# Altium PCB Ada - Base Block - Baseblock_issue 4.0.PcbDoc (part 1 of 2)
Units mil, origin at the board's own origin, x right, y up, seen from the top; angles counter-clockwise.
Board outline 2389.8 x 4110.27 mil, 2 copper layers (Top Layer, Bottom Layer), stack 61.855 mil thick; 112 components, 93 nets, 358 pads, 233 vias.
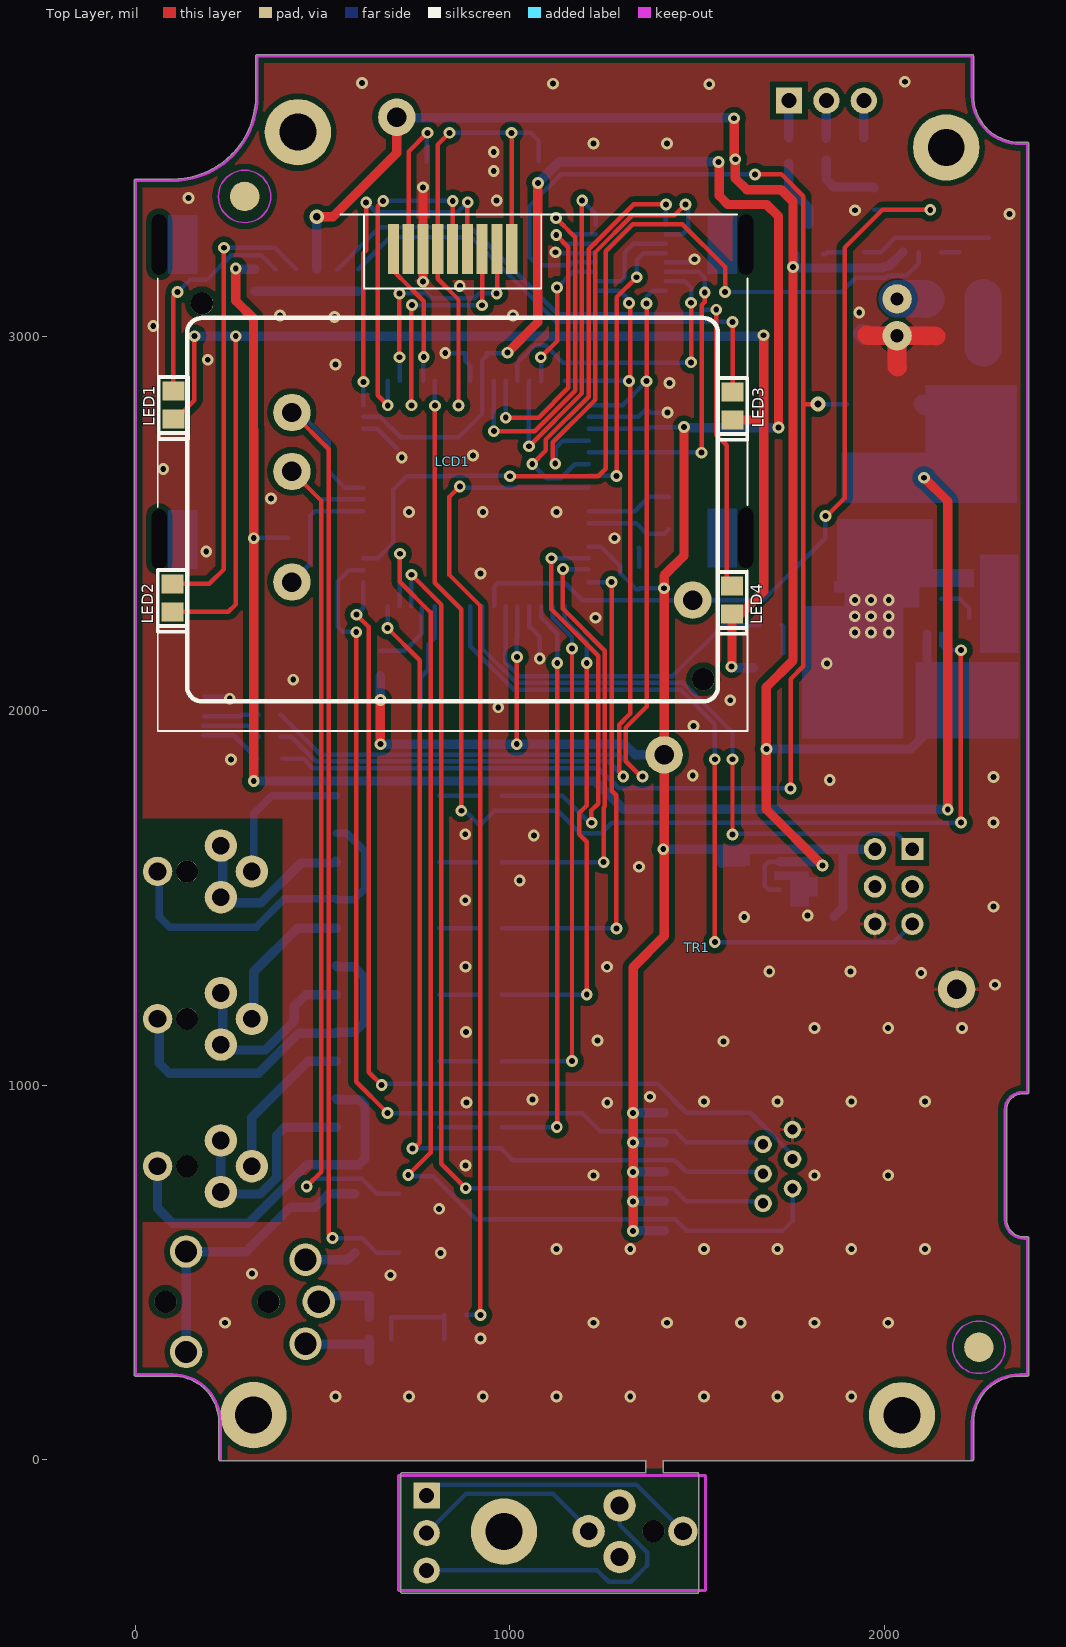
[diagram p0: Top Layer view]
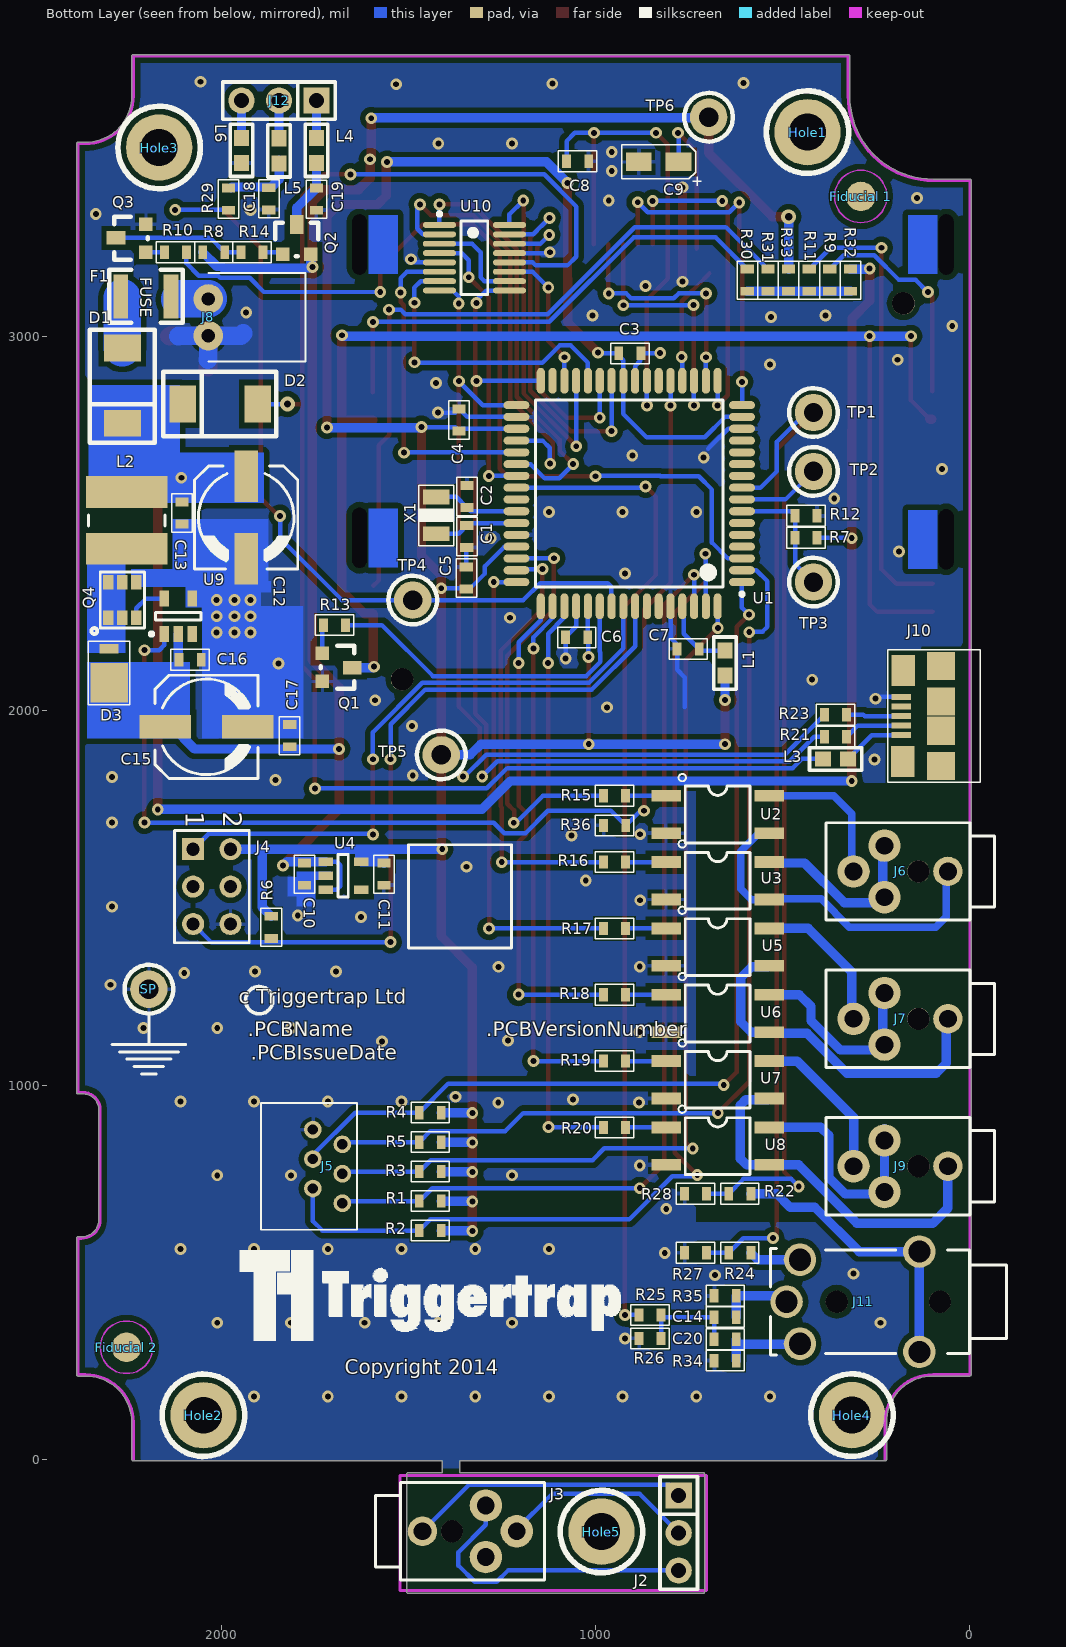
[diagram p1: Bottom Layer view, seen from below]
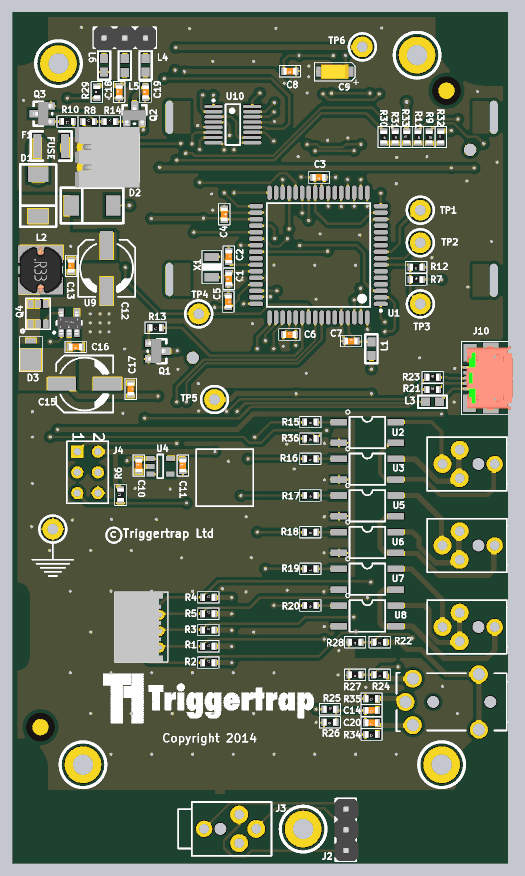
[diagram p3: 3D render of the assembled board from below, using the file's embedded part models]

## Layer stack, top to bottom
Top Solder: solder mask 0.4, Solder Resist, Dk 3.5
Top Layer: signal copper 1.4
Dielectric1: core 59.0551, FR-4, Dk 4.8
Bottom Layer: signal copper 1.4
Bottom Solder: solder mask 0.4, Solder Resist, Dk 3.5

## Board outline
222.63,0.29 cw(c226.58,0.29) 222.63,0.35 222.63,98.71 ccw(c98.63,98.71) 98.63,222.71 cw(c98.63,226.66) 98.6,222.71 0.21,222.71 cw(c0.21,226.66) -3.74,226.66 -3.74,3415.64 cw(c0.21,3415.64) 0.21,3419.59 98.63,3419.59 cw(c98.63,3415.64) 98.66,3419.59 ccw(c98.63,3642.02) 321.06,3641.99 cw(c325.01,3642.02) 321.06,3642.02 321.06,3748.32 cw(c325.01,3748.32) 325.01,3752.27 2234.46,3752.27 cw(c2234.46,3748.32) 2238.41,3748.32 2238.41,3642.02 ccw(c2362.41,3642.02) 2362.41,3518.02 cw(c2362.41,3514.07) 2362.44,3518.02 2382.1,3518.02 cw(c2382.1,3514.07) 2386.05,3514.07 2386.05,980.31 cw(c2382.1,980.31) 2382.1,976.36 2368.9,976.36 ccw(c2368.9,980.31) 2368.93,976.36 2368.9,976.36 ccw(c2368.9,934.25) 2326.79,934.25 2326.79,640.55 ccw(c2372.83,640.55) 2372.83,594.5 2382.1,594.5 cw(c2382.1,590.55) 2386.05,590.55 2386.05,226.66 cw(c2382.1,226.66) 2382.1,222.71 2362.41,222.71 ccw(c2362.41,226.66) 2362.44,222.71 2362.41,222.71 ccw(c2362.41,98.71) 2238.41,98.71 2238.41,0.29 cw(c2234.46,0.29) 2234.46,-3.67 1409.46,-3.67 1409.46,-35.13 1500,-35.13 cw(c1500,-39.08) 1503.95,-39.08 1503.95,-354.05 cw(c1500,-354.05) 1500,-358 712.6,-358 cw(c712.6,-354.05) 708.65,-354.05 708.65,-39.08 cw(c712.6,-39.08) 712.6,-35.13 1362.19,-35.13 1362.19,-3.67 226.65,-3.67 cw(c226.58,0.28)

## Design rules (kind name [scope] priority, off if disabled: settings)
AssemblyTestPointUsage [All] p1 off:
AssemblyTestpoint [All] p1 off: testpointundercomponent=TRUE minsize=40 maxsize=100 preferedsize=60 minholesize=0 maxholesize=40 preferedholesize=32 testpointgrid=1 usegrid=TRUE gridtolerance=0.01 allowsidetop=TRUE allowsidebottom=TRUE
Clearance Clearance_Plane [InPolygon] p1: gap=15 // Clearance to planes
Clearance [All] p2: gap=6
ComponentClearance [All] p1 off: gap=10 collisioncheckmode=3 verticalgap=10 showdistances=FALSE
DiffPairsRouting [All] p1 off: maxlimit=10 minlimit=10 mostfreqgap=10 toplayer_minwidth=15 toplayer_maxwidth=15 toplayer_prefwidth=15 bottomlayer_minwidth=15 bottomlayer_maxwidth=15 bottomlayer_prefwidth=15 maxuncoupledlength=500
FabricationTestPointUsage [All] p1 off: valid=0 allowmultiple=FALSE
FabricationTestpoint [All] p1 off: side=3 testpointundercomponent=TRUE minsize=40 maxsize=100 preferedsize=60 minholesize=0 maxholesize=40 preferedholesize=32 testpointgrid=1 allowsidetop=TRUE allowsidebottom=TRUE usegrid=TRUE gridtolerance=0.01
FanoutControl Fanout_BGA [IsBGA] p1 off: bgadir=Out bgaviamode=Centered fanoutstyle=Auto fanoutdirection=Alternating viagrid=1 // Fanout_BGA (Default Rule)
FanoutControl Fanout_LCC [IsLCC] p2 off: bgadir=Out bgaviamode=Centered fanoutstyle=Auto fanoutdirection=Alternating viagrid=1 // Fanout_LCC (Default Rule)
FanoutControl Fanout_SOIC [IsSOIC] p3 off: bgadir=Out bgaviamode=Centered fanoutstyle=Auto fanoutdirection=Alternating viagrid=1 // Fanout_SOIC (Default Rule)
FanoutControl Fanout_Small [(CompPinCount < 5)] p4 off: bgadir=Out bgaviamode=Centered fanoutstyle=Auto fanoutdirection=OutThenIn viagrid=1 // Fanout_Small (Default Rule)
FanoutControl Fanout_Default [All] p5 off: bgadir=Out bgaviamode=Centered fanoutstyle=Auto fanoutdirection=Alternating viagrid=1 // Fanout_Default (Default Rule)
Height Height_1 [WithinRoom('RoomDefinition_1') and OnBottomLayer] p1: minheight=0 maxheight=104.33 prefheight=62.99
Height [WithinRoom('RoomDefinition') and OnBottomLayer] p2: minheight=0 maxheight=708.66 prefheight=708.66
HoleSize [All] p1 off: absolutevalues=TRUE maxlimit=250 minlimit=1 maxpercent=80.000 minpercent=20.000
HoleSize Testpoint [All] p2 off: absolutevalues=TRUE maxlimit=100 minlimit=1 maxpercent=80.000 minpercent=20.000
HoleSize TestPointUsage [All] p3 off: absolutevalues=TRUE maxlimit=100 minlimit=1 maxpercent=80.000 minpercent=20.000
HoleToHoleClearance [All] p1 off: gap=10 allowstackedmicrovias=TRUE
MinimumSolderMaskSliver [All] p1 off: minsoldermaskwidth=3
MinimumSolderMaskSliver SilkscreenOverComponentPads [All] p2 off: minsoldermaskwidth=10
PasteMaskExpansion [All] p1 off: expansion=0
PolygonConnect PolygonConnect_Via [IsVia] p1: connectstyle=Direct reliefconductorwidth=10 reliefentries=4 polygonreliefangle="90 Angle" airgapwidth=10 // Direct connect to vias
PolygonConnect [All] p2: connectstyle=Relief reliefconductorwidth=10 reliefentries=4 polygonreliefangle="90 Angle" airgapwidth=10
RoomDefinition [(InComponentClass('Components Class 1'))] p1: confinementstyle=ConfineIn formatcopy=TRUE lockcomponents=FALSE outline 2462.58,3710.84 1793.29,3710.84 1793.29,-182.86 2462.58,-182.86
RoomDefinition RoomDefinition_1 [(InComponentClass('Components Class 2'))] p2: confinementstyle=ConfineIn formatcopy=TRUE lockcomponents=FALSE outline 1793.29,3734.46 935.02,3734.46 919.27,2974.73 344.47,2971.28 344.47,381.3 1793.29,381.3
RoutingVias [All] p1: holewidth=19.68 width=39.37 viastyle="Through Hole" minholewidth=11.81 minwidth=19.68 maxholewidth=19.68 maxwidth=39.37
SilkToBoardRegionClearance [All] p1 off:
SilkToSilkClearance [All] p1 off: silktosilkclearance=1
SilkToSolderMaskClearance [IsPad] p1: minsilkscreentomaskgap=1 clearancetoexposedcopper=TRUE
SolderMaskExpansion [All] p1: expansion=4
UnpouredPolygon [All] p1: allowunpoured=FALSE
Width [All] p1: maxlimit=500 minlimit=8 preferedwidth=12
10 further rules are at their usual default settings.

## Classes and differential pairs
component class "U_TRI002 Base Block Daughter Board": J2 J3
component class "TRI002 Base Block Cover sheet Issue 3.1": "Fiducial 1" "Fiducial 2" Hole1 Hole2 Hole3 Hole4 Hole5 SP TR1
component class "U_TRI002 Base Block Microcontroller Issue 1": C1 C2 C3 C4 C5 C6 C7 C8 C9 J4 J5 L1 LCD1 LED1 LED2 LED3 LED4 Q1 Q2 Q3 R1 R2 R3 R4 R5 R6 R7 R8 R9 R10 R11 R12 R13 R14 R30 R31 R32 R33 TP1 TP2 TP3 TP4 U1 X1
component class "U_TRI002 Base Block PSU and Connectors Issue 1": C10 C11 C12 C13 C14 C15 C16 C17 C18 C19 C20 D1 D2 D3 F1 J6 J7 J8 J9 J10 J11 J12 L2 L3 L4 L5 L6 Q4 R15 R16 R17 R18 R19 R20 R21 R22 R23 R24 R25 R26 R27 R28 R29 R34 R35 R36 TP5 TP6 U2 U3 U4 U5 U6 U7 U8 U9 U10

## Components (designator, comment, footprint, x,y, rotation, side; value= is the part's Value field where it differs from the comment)
C1 "18pF" C0603 1345.53,2465.01 r90 bottom
C2 "18pF" C0603 1341.15,2571.69 r270 bottom
C3 "100nF, 16V, 0603" C0603 908.24,2952.31 r0 bottom
C4 "100nF, 16V, 0603" C0603 1362.65,2776.52 r270 bottom
C5 "10nF" C0603 1342.96,2354.33 r270 bottom
C6 "10nF" C0603 1050.15,2197.6 r180 bottom
C7 "1uF, 16V, 0603" C0603 752.41,2166.28 r180 bottom
C8 "100nF, 16V, 0603" C0603 1047.69,3465.5 r0 bottom
C9 "4U7F, 10V, case_a" "KEMET CASE A" 831.15,3465.5 r0 bottom
C10 "1uF, 16V, 0603" C0603 1779.53,1562.99 r90 bottom
C11 "1uF, 16V, 0603" C0603 1566.93,1562.99 r90 bottom
C12 "10uF,16V,SMD" CAP6.8/6.8 1933.07,2515.75 r270 bottom
C13 "2u2F" C0603 2106.3,2527.56 r90 bottom
C14 "100nF, 16V, 0603" C0603 653.54,377.95 r0 bottom
C15 "220uF, 16V, SMD" CAP6.8/6.8 2039.37,1956.69 r180 bottom
C16 "100nF, 16V, 0603" C0603 2082.68,2133.86 r0 bottom
C17 "2u2F" C0603 1814.96,1933.07 r270 bottom
C18 "Capacitor 0603" C0603 1874.46,3367.07 r90 bottom
C19 "Capacitor 0603" C0603 1747.13,3366.01 r90 bottom
C20 "100nF, 16V, 0603" C0603 653.54,318.9 r0 bottom
D1 "BYM13-40" DO214-AA 2263.78,2767.72 r90 bottom
D2 "BYM13-40" DO214-AA 2102.36,2818.9 r180 bottom
D3 "MBRM110LT3G" POWERMITE 2299.21,2074.8 r90 bottom
F1 "500mA polyfuse" "1210 FUSE" 2200.79,3106.3 r0 bottom
"Fiducial 1" "Fiducial" FMARK 291.44,3373.27 r90 bottom
"Fiducial 2" "Fiducial" FMARK 2252.73,299.43 r90 bottom
Hole1 "3mm Mounting hole" "3mm mounting hole" 433.65,3545.09 r180 bottom
Hole2 "3mm Mounting hole" "3mm mounting hole" 2047.15,117.91 r180 bottom
Hole3 "3mm Mounting hole" "3mm mounting hole" 2165.44,3504.05 r180 bottom
Hole4 "3mm Mounting hole" "3mm mounting hole" 315.06,118.24 r180 bottom
Hole5 "3mm Mounting hole" "3mm mounting hole" 984.02,-192.91 r180 bottom
J2 "Header 3" sip3 777.77,-96.57 r270 bottom
J3 "2.5mm PHONEJACK STEREO TRI001" "2.5MM SOCKET TRI001" 1462.18,-191.98 r270 bottom
J4 "JTAG" HDR2X3 2074.8,1629.92 r270 bottom
J5 "Keypad connector" HLW6R-2C7LF 1676.09,762.83 r270 bottom locked
J6 "2.5mm PHONEJACK STEREO TRI001" "2.5MM SOCKET TRI001" 58.71,1570.41 r90 bottom
J7 "2.5mm PHONEJACK STEREO TRI001" "2.5MM SOCKET TRI001" 58.71,1176.71 r90 bottom
J8 "Battery 3V" "Molex 0022057025" 2034.06,3001.24 r270 bottom locked
J9 "2.5mm PHONEJACK STEREO TRI001" "2.5MM SOCKET TRI001" 58.71,783.01 r90 bottom
J10 "micro USB Female" "MICRO USB RECEPTACLE" 183.39,1934.39 r90 bottom
J11 "3.5mm PHONEJACK STEREO TRI001" "CLIFF 3.5MM 4 POLE SOCKET" 1.23,421.12 r90 bottom
J12 "Header 3" sip3 1745.32,3629.28 r0 bottom locked
L1 "0R15,1A,220R,0603" L0603 653.99,2126.91 r90 bottom
L2 "Inductance" WE-PD2_5848 2251.97,2507.87 r270 bottom
L3 "0R15,1A,220R,0603" L0603 358.71,1871.01 r0 bottom
L4 "0R15,1A,220R,0603" L0603 1745.15,3496.31 r270 bottom
L5 "0R15,1A,220R,0603" L0603 1845.33,3495.13 r270 bottom
L6 "0R15,1A,220R,0603" L0603 1945.53,3496.31 r270 bottom
LCD1 "LPH-7366" LPH-7366 846.68,2575.73 r0 top
LED1 "LED RED 0805 SUPER-RED" "LED, RED, 0805" 101.07,2816.01 r270 top
LED2 "LED RED 0805 SUPER-RED" "LED, RED, 0805" 98.79,2301.06 r270 top
LED3 "LED RED 0805 SUPER-RED" "LED, RED, 0805" 1594.6,2813.5 r270 top
LED4 "LED RED 0805 SUPER-RED" "LED, RED, 0805" 1593.27,2295.73 r270 top
Q1 "FDN335N" SOT-23 1729.47,2153.06 r270 bottom
Q2 "NTR2101PT1G" "SOT-23 DIODE - duplicate" 1835.87,3218.67 r180 bottom
Q3 "BC847B" SOT-23T 2200.79,3224.41 r90 bottom
Q4 "" TSOP6 2263.78,2295.28 r90 bottom
R1 "Resistor 0603" R0603 1441.39,689.92 r180 bottom
R2 "Resistor 0603" R0603 1441.39,611.18 r180 bottom
R3 "Resistor 0603" R0603 1441.39,768.66 r180 bottom
R4 "Resistor 0603" R0603 1441.39,926.14 r180 bottom
R5 "Resistor 0603" R0603 1441.39,847.4 r180 bottom
R6 "Resistor 0603" R0603 1866.14,1421.26 r90 bottom
R7 "Resistor 0603" R0603 437.45,2461.56 r180 bottom
R8 "Resistor 0603" R0603 2019.68,3224.41 r180 bottom
R9 "Resistor 0603" R0603 374.02,3149.61 r270 bottom
R10 "Resistor 0603" R0603 2122.05,3224.41 r0 bottom
R11 "Resistor 0603" R0603 429.13,3149.61 r270 bottom
R12 "Resistor 0603" R0603 437.45,2520.61 r0 bottom
R13 "Resistor 0603" R0603 1696.85,2228.35 r0 bottom
R14 "Resistor 0603" R0603 1917.32,3224.41 r180 bottom
R15 "Resistor 0603" R0603 949.26,1772.58 r0 bottom
R16 "Resistor 0603" R0603 949.26,1595.42 r0 bottom
R17 "Resistor 0603" R0603 949.26,1418.25 r0 bottom
R18 "Resistor 0603" R0603 949.26,1241.09 r0 bottom
R19 "Resistor 0603" R0603 949.26,1063.92 r0 bottom
R20 "Resistor 0603" R0603 949.26,886.76 r0 bottom
R21 "Resistor 0603" R0603 358.71,1930.06 r180 bottom
R22 "Resistor 0603" R0603 614.62,709.59 r0 bottom
R23 "Resistor 0603" R0603 358.71,1989.12 r180 bottom
R24 "Resistor 0603" R0603 614.62,552.11 r0 bottom
R25 "Resistor 0603" R0603 854.33,385.83 r180 bottom
R26 "Resistor 0603" R0603 854.33,322.83 r0 bottom
R27 "Resistor 0603" R0603 732.73,552.11 r0 bottom
R28 "Resistor 0603" R0603 732.73,709.59 r0 bottom
R29 "Resistor 0603" R0603 1980.32,3366.14 r90 bottom
R30 "Resistor 0603" R0603 594.49,3149.61 r270 bottom
R31 "Resistor 0603" R0603 539.37,3149.61 r270 bottom
R32 "Resistor 0603" R0603 318.9,3149.61 r90 bottom
R33 "0R" R0603 484.25,3149.61 r90 bottom
R34 "0R" R0603 653.54,263.78 r0 bottom
R35 "0R" R0603 653.54,437.01 r0 bottom
R36 "Resistor 0603" R0603 948.82,1692.91 r0 bottom
SP "Scope GND point" "Scope GND point" 2192.91,1255.91 r180 bottom
TP1 "Test point" TP 417.76,2796.21 r180 bottom
TP2 "Test point" TP 417.76,2638.73 r180 bottom
TP3 "Test point" TP 417.76,2343.45 r180 bottom
TP4 "Test point" TP 1488.19,2295.28 r180 bottom
TP5 "Test point" TP 1411.86,1881.89 r180 bottom
TP6 "Test point" TP 697.88,3584.92 r180 bottom
TR1 "trace label" TraceLabel 1500,1366.14 r180 top
U1 "ATxmega256A3U-AU" 64A_N 909.89,2579.67 r0 bottom
U2 "LTV-817" SMD-4 811.47,1772.58 r180 bottom
U3 "LTV-817" SMD-4 811.47,1595.42 r180 bottom
U4 "AAT3221IGV-3.3-T1" "TSOT 5 pin" 1673.23,1559.06 r180 bottom
U5 "LTV-817" SMD-4 811.47,1418.25 r180 bottom
U6 "LTV-817" SMD-4 811.47,1241.09 r180 bottom
U7 "LTV-817" SMD-4 811.47,1063.92 r180 bottom
U8 "LTV-817" SMD-4 811.47,886.76 r180 bottom
U9 "NCP1450" SOT23-5AN 2114.17,2251.97 r90 bottom
U10 "FT230XS-R" SSOP-16_N 1323.28,3209.59 r180 bottom
X1 "XTAL 32.768KHZ" "FC 13F" 1425.2,2472.44 r90 bottom

## Footprints (in the part's own frame and the unit in brackets; to place one, negate y for a bottom-side part, rotate by r counter-clockwise, add the part's x,y. Pads: shape width x height; smd on the part's side, far side on the other; paste and mask are expansions set on the pad)
"2.5MM SOCKET TRI001" [mm]
  round 1.5 hole 1.5 unplated: 0(0,2)
  round 2 hole 1.2: 1(0,0)
  round 2.2 hole 1.2: 2(-1.75,4.3) 3(1.75,4.3) 4(0,6.4)
  silkscreen extent -3.3,-3.18 3.3,8.27, body extent -2.5,-4.2 2.5,6.6, height 5
"3mm mounting hole" [mm]
  round 4.5 hole 2.5: 1(0,0)
  silkscreen extent -2.8,-2.8 2.8,2.8
64A_N [mm] "Thin QFP, 64-Leads, Body 14x14mm, Pitch 0.8mm, IPC Medium Density"
  oval 1.75x0.55 smd: 1(-7.65,6) 2(-7.65,5.2) 3(-7.65,4.4) 4(-7.65,3.6) 5(-7.65,2.8) 6(-7.65,2) 7(-7.65,1.2) 8(-7.65,0.4) 9(-7.65,-0.4) 10(-7.65,-1.2) 11(-7.65,-2) 12(-7.65,-2.8) 13(-7.65,-3.6) 14(-7.65,-4.4) 15(-7.65,-5.2) 16(-7.65,-6) 33(7.65,-6) 34(7.65,-5.2) 35(7.65,-4.4) 36(7.65,-3.6) 37(7.65,-2.8) 38(7.65,-2) 39(7.65,-1.2) 40(7.65,-0.4) 41(7.65,0.4) 42(7.65,1.2) 43(7.65,2) 44(7.65,2.8) 45(7.65,3.6) 46(7.65,4.4) 47(7.65,5.2) 48(7.65,6)
  oval 0.55x1.75 smd: 17(-6,-7.65) 18(-5.2,-7.65) 19(-4.4,-7.65) 20(-3.6,-7.65) 21(-2.8,-7.65) 22(-2,-7.65) 23(-1.2,-7.65) 24(-0.4,-7.65) 25(0.4,-7.65) 26(1.2,-7.65) 27(2,-7.65) 28(2.8,-7.65) 29(3.6,-7.65) 30(4.4,-7.65) 31(5.2,-7.65) 32(6,-7.65) 49(6,7.65) 50(5.2,7.65) 51(4.4,7.65) 52(3.6,7.65) 53(2.8,7.65) 54(2,7.65) 55(1.2,7.65) 56(0.4,7.65) 57(-0.4,7.65) 58(-1.2,7.65) 59(-2,7.65) 60(-2.8,7.65) 61(-3.6,7.65) 62(-4.4,7.65) 63(-5.2,7.65) 64(-6,7.65)
  silkscreen extent -7.77,-6.35 6.35,6.95, body extent -7,-7 7,7, height 1.2
"1210 FUSE" [mm]
  rect 1x3 smd: 1(-1.7,0) 2(1.7,0)
  silkscreen extent -2.5,-1.8 2.5,1.8
C0603 [mm] "Chip Capacitor; Body 1.6 x 0.8 mm (LxW typ)"
  rect 0.6x0.9 smd: 1(-0.75,-0.05) 2(0.75,-0.05)
  silkscreen extent -1.3,-0.75 1.3,0.65, body extent -0.8,-0.45 0.8,0.35, height 0.3
CAP6.8/6.8 [mm]
  rect 3.5x1.6 smd: 1(-2.8,0) 2(2.8,0)
  silkscreen extent -3.5,-3.5 3.5,3.5, body extent -3.3,-3.3 3.3,3.3, height 5.4
"CLIFF 3.5MM 4 POLE SOCKET" [mm]
  round 1.5 hole 1.5 unplated: 0(0,2) 0(0,9)
  round 2.2 hole 1.5: 1(0,12.4) 2(2.85,11.5) 3(-3.4,3.4) 3(3.4,3.4) 6(-2.85,11.5)
  silkscreen extent -3.6,-2.5 3.6,13.5, body extent -3.5,-2.5 3.5,12.6, height 6
DO214-AA [mm]
  rect 1.8x2.5 smd: A(5.1,0) K(0,0)
  silkscreen extent -1.32,-2.2 6.35,2.2, body extent -0.25,-2.13 5.65,2.18, height 3.74
"FC 13F" [mm]
  rect 1x1.8 smd: 1(0,0) 2(2.5,0)
  silkscreen extent -0.8,-1.2 3.3,1.2
FMARK [mm]
  round 2 all layers, no hole mask+0.762: 0(0,0)
  Keep-Out Layer circle w0.1: c0,0 r1.778
HDR2X3 [mm] "Connector; Header; 2x3 Position"
  rect 1.5x1.5 hole 0.9: 1(0,0)
  round 1.5 hole 0.9: 2(0,2.54) 3(2.54,0) 4(2.54,2.54) 5(5.08,0) 6(5.08,2.54)
  silkscreen extent -1.27,-1.27 6.35,3.81
HLW6R-2C7LF [mm] "FFC 6 way 1mm pitch"
  round 1.2 hole 0.7: 1(-3,-2) 2(-2,0) 3(-1,-2) 4(0,0) 5(1,-2) 6(2,0)
  silkscreen extent -4.8,-5.53 3.8,1, body extent -4.8,-5.5 3.8,0.4, height 3.91
"KEMET CASE A" [mm]
  rect 1.75x1.25 smd: 1(-1.35,0) 2(1.35,0)
  silkscreen extent -2.9,-1.15 2.5,1.6, body extent -2.39,-0.9 2.41,0.9, height 1.8
L0603 [mm] "INDUCTOR"
  rect 1.1x1 smd: 1(-0.85,0) 2(0.85,0)
  silkscreen extent -1.78,-0.76 1.78,0.76, body extent -1.5,-0.6 1.5,0.6, height 1
"LED, RED, 0805" [mm] "LED RED"
  rect 1.3x1.5 smd: A(-0.95,0) K(0.95,0)
  silkscreen extent -1.9,-1 2.3,1, body extent -1.7,-0.85 1.7,0.85, height 1
LPH-7366 [mm]
  rrect100% 0x0 hole 1 slot 4.1 at 90 deg: 0(-19.9,-3) 0(-19.9,17) 0(19.9,-2.9) 0(19.9,17)
  round 1.524 hole 1.524: 0(-17,13.005) 0(17.018,-12.5)
  rect 0.762x3.4 smd: 1(4.013,16.7) 2(3.023,16.7) 3(2.007,16.7) 4(1.016,16.7) 5(0,16.7) 6(-1,16.7) 7(-2,16.7) 8(-3,16.7) 9(-4,16.7)
  Bottom Layer region: 19.3,-0.9 17.3,-0.9 17.3,-4.9 19.3,-4.9
  Bottom Layer region: 19.3,19 17.3,19 17.3,15 19.3,15
  Bottom Layer region: -19.3,15 -17.3,15 -17.3,19 -19.3,19
  Bottom Layer region: -19.3,-5 -17.3,-5 -17.3,-1 -19.3,-1
  silkscreen extent -20,-16 20.02,19.02, body extent -20,-16 20,19, height 3.6
"MICRO USB RECEPTACLE" [mm] "B type"
  rect 1.9x1.9 smd: 0(-2.1,-2.7) 0(0.3,-2.7) 0(2.3,-2.7) 0(4.7,-2.7)
  rect 2.1x1.6 smd: 0(-1.8,-0.1) 0(4.4,-0.15)
  rect 0.4x1.35 smd: 1(0,0) 2(0.65,0) 3(1.3,0) 4(1.95,0) 5(2.6,0)
  silkscreen extent -3.2,-5.35 5.8,0.9, body extent -2.66,-5.36 5.26,0.3, height 2.72
"Molex 0022057025" [mm]
  round 2 hole 0.9: 1(-2.5,0) 2(0,0)
  silkscreen extent -4.25,0 1.75,6.6, body extent -5,-1.3 2.4,6.6, height 4.95
POWERMITE [mm]
  rect 0.635x1.27 smd: A(2.29,0)
  rect 2.67x2.54 smd: K(0,0)
  silkscreen extent -1.5,-1.4 2.8,1.4, body extent -1,-1 2.45,1, height 1.15
R0603 [mm] "Chip Capacitor; Body 1.6 x 0.8 mm (LxW typ)"
  rect 0.6x0.9 smd: 1(-0.75,0) 2(0.75,0)
  silkscreen extent -1.3,-0.7 1.3,0.7, body extent -0.8,-0.42 0.8,0.38, height 0.3
"Scope GND point" [mil]
  round 100 hole 52: 1(0,0)
  silkscreen extent -98,-226 98,65
sip3 [mil]
  rect 70x70 hole 40: 1(0,0)
  round 70 hole 40: 2(100,0) 3(200,0)
  silkscreen extent -50,-50 250,50, body extent -50,-54 250,61, height 336
SMD-4 [mm]
  rect 2x0.8 smd: 1(0,0) 2(0,-2.54) 3(7,-2.54) 4(7,0)
  silkscreen extent 0.85,-3.19 5.7,1.48, body extent 1.3,-3.2 5.7,0.6, height 2
SOT23-5AN [mm] "SOT23, 5-Leads, Body 2.9x1.6mm, Pitch 0.95mm, Lead Span 2.8mm, IPC Medium Density"
  rect 1.1x0.65 smd: 1(-1.2,0.95) 2(-1.2,0) 3(-1.2,-0.95) 4(1.2,-0.95) 5(1.2,0.95)
  silkscreen extent -1.32,-1.55 0.25,1.95, body extent -1.42,-1.45 1.38,1.45, height 1.09
SOT-23 [mil] "FET"
  rect 36x50 smd: D(38,80)
  rect 36x36 smd: G(0,0) S(75,0)
  silkscreen extent -20,-5 95,85, body extent -20,-11 94,84, height 39
"SOT-23 DIODE - duplicate" [mil]
  rect 36x36 smd: 1(0,0) 2(75,0)
  rect 36x50 smd: 3(38,80)
  silkscreen extent -20,-5 95,85, body extent -20,-11 94,84, height 39
SOT-23T [mil]
  rect 36x36 smd: B(0,0) E(75,0)
  rect 36x50 smd: C(38,80)
  silkscreen extent -20,-5 95,85, body extent -19,-9 95,86, height 39
SSOP-16_N [mm] "SOP, 16-Leads, Body 4.9x3.9mm, Pitch 0.635mm, IPC Medium Density"
  oval 2.25x0.4 smd: 1(-2.375,2.223) 2(-2.375,1.588) 3(-2.375,0.953) 4(-2.375,0.318) 5(-2.375,-0.317) 6(-2.375,-0.952) 7(-2.375,-1.587) 8(-2.375,-2.222) 9(2.375,-2.223) 10(2.375,-1.588) 11(2.375,-0.953) 12(2.375,-0.318) 13(2.375,0.317) 14(2.375,0.952) 15(2.375,1.587) 16(2.375,2.222)
  silkscreen extent -2.5,-2.5 0.9,3.1, body extent -1.99,-2.5 1.99,2.5, height 1.76
TP [mil]
  round 100 hole 52: 1(0,0)
  silkscreen extent -65,-65 65,65
TraceLabel [mil]
TSOP6 [mm]
  rect 1x0.7 smd: 1(-1.2,0.95) 2(-1.2,0) 3(-1.2,-0.95) 4(1.2,-0.95) 5(1.2,0) 6(1.2,0.95)
  silkscreen extent -2.3,-1.5 1.9,2.1, body extent -0.85,-1.55 0.85,1.55, height 1.1
"TSOT 5 pin" [mm] "SOT23, 5-Leads, Body 2.9x2.8mm (max), Pitch 0.95mm, IPC Medium Density"
  rect 1x0.6 smd: 1(-1.2,0.95) 2(-1.2,0) 3(-1.2,-0.95) 4(1.2,-0.95) 5(1.2,0.95)
  silkscreen extent -0.38,-1.45 0.33,1.45, body extent -0.8,-1.45 0.8,1.45, height 0.9
WE-PD2_5848 [mm] "SMD Inductor, 2-Leads, Body 5,8x5,2mm"
  rect 2.15x5.5 smd: 1(-1.925,0) 2(1.925,0)
  silkscreen extent -0.38,-2.6 0.38,2.6, body extent -2.89,-2.6 2.89,2.6, height 4.49

## Part data
C1 C2: library part "18pF, 50V, 0603", "Ceramic"
C3 C4 C7 C8 C10 C11 C14 C16 C18 C19 C20: "Ceramic"
C5 C6: library part "10nF, 50V, 0603", "Ceramic"
C9: "Tantalum"
C12: library part "10uF, 16V, SMD", "Electrolitic"
C13 C17: library part "2u2F, 16V, 0603", "Ceramic"
C15: "Electrolitic"
D1 D2: "SCHOTTKY DIODE"
D3: "SCHOTTKY DIODE 1A, POWERMITE"
F1: "Polyfuse"
"Fiducial 1" "Fiducial 2": library part "F Mark"
J2 J12: "Header, 3-Pin"
J3 J6 J7 J9: "2.5mm PHONEJACK STEREO"
J4: library part "Header 2x3", "Header, 15-Pin, Dual row"
J5: library part "Header 6", "Header, 6-Pin"
J8: library part "Header 2", "Header, 2-Pin"
J10: "Header, 5-Pin"
J11: library part "3.5mm PHONEJACK 4 pole", "3.5mm PHONEJACK STEREO"
L1 L3 L4 L5 L6: "FERRITE BEAD"
L2: library part "WE-PD2 5848, M, 74477410", "SMD Power Inductor WE-PD2, L=10.0 µH"
LED1 LED2 LED3 LED4: "LED, SMD, 0805, SUPER-RED"
Q2: library part PMOS-2, "P-Channel Power MOSFET"
Q4: library part IRLML0060TRPBF, "N-channel MOSFET Transistor 5.1A 20V, 6-Pin TSOP"
R33 R34 R35: library part "Resistor 0603", "Resistor 0603"
SP: "Scope probe earth point"
TP1 TP2 TP3 TP4 TP5 TP6: "Test Point"
U1: "8/16-bit AVR XMEGA A4 Microcontroller, 1.6-3.6V, 32MHz, 256K + 8KB Flash, 4K EEPROM, 16K SRAM, 64-pin TQFP, Industrial Grade (-40°C to 85°C)"
U2 U3 U5 U6 U7 U8: "OPTOCOUPLER, 5KV, TRANSISTOR O/P"
U4: "3.3V LDO Regulator"
U9: library part NCP1402SN50T1G, "DC-DC STEP UP CONVERTER, 5.0V, SMD"
U10: "USB to Basic UART Interface Chip, UHCI/OHCI/EHCI Compatible, USB 2.0 Compatible, -40 to +85 degC, 16-Pin SSOP, Pb-Free, Tape and Reel"
X1: "Crystal Oscillator, 32.768KHZ"

## Via types
v1: diameter 31.5, hole 15.75, Top Layer to Bottom Layer, tented both sides, 231 vias
v2: diameter 39.37, hole 19.68, Top Layer to Bottom Layer, tented both sides, 2 vias

## Nets (pads, with @x,y where several pads share a name; then routed paths per layer and width w, separated by ;. In a path a pad name is that pad's centre, name@x,y a point inside that pad or via, vN(x,y) a via of type N, cw(c..) or ccw(c..) an arc to the next point about the centre after c; other vN are vias at no path point)
3V3: C3.2 C4.2 C5.2 C6.2 C11.2 J4.2 L1.1 R1.2 R2.2 R3.2 R4.2 R5.2 R6.2 TP5.1 U1.15 U1.25 U1.35 U1.45 U1.53 U4.5 | length 7985.2
  Top Layer w12: v1(1018.16,1910.38) v1@1018.16,2145.39
  Top Layer w25: v1(653.99,1910.38) v1(653.99,2028.49) ; v1(993.19,2956.07) 1074.3,3037.17 1074.3,3153.3 ; 1074.8,3152.8 v1(1074.8,3409.45) ; v1(1329.02,610.24) v1(1329.02,688.98) v1(1329.02,767.72) v1(1329.02,846.46) v1(1329.02,925.2) 1329.02,1314.18 1411.86,1397.02 1411.86,1910.38 v1(1411.86,2326.77) 1411.86,2360.68 1464.84,2413.65 v1(1464.84,2757.66) ; v1(1556.72,3465.61) 1558.92,3463.41 1558.92,3374.89 1582.03,3351.78 1685.53,3351.78 1717.18,3320.13 v1(1717.18,2755.91)
  Bottom Layer w12: U1.15@608.71,2784.39 653.98,2784.39 708.11,2730.27 863.64,2730.27 925.64,2792.27 U1.25@925.64,2880.85 925.64,2935.42 C3.2@939.42,2949.2 ; C3.2@937.77,2954.28 991.41,2954.28 v1(993.19,2956.07) ; v1(1018.86,2142.98) 1018.86,2193.87 C6.2@1020.62,2195.63 ; C6.2@1020.13,2195.63 U1.53@1020.13,2278.49 ; U1.45@1211.07,2437.94 1243.16,2437.94 1295.28,2385.83 1295.28,2366.14 1336.61,2324.8 C5.2@1344.93,2324.8 1346.9,2326.77 v1(1411.86,2326.77) ; U1.35@1211.07,2752.9 1358.71,2752.9 C4.2@1364.62,2746.99 1374.46,2756.84 v1@1464.84,2756.84
  Bottom Layer w25: v1(653.99,1910.38) v1(1018.16,1910.38) 1306.16,1910.38 1334.65,1881.89 TP5.1@1411.86,1881.89 ; v1(653.99,2028.49) L1.1@653.99,2093.45 ; v1(1074.8,3409.45) 1074.89,3409.45 1131.05,3465.61 v1(1556.72,3465.61) ; v1(1329.02,610.24) 1329.97,611.18 R2.2@1411.86,611.18 ; v1(1329.02,688.98) 1329.97,689.92 R1.2@1411.86,689.92 ; v1(1329.02,767.72) 1329.97,768.66 R3.2@1411.86,768.66 ; v1(1329.02,846.46) 1329.97,847.4 R5.2@1411.86,847.4 ; v1(1329.02,925.2) 1329.97,926.14 R4.2@1411.86,926.14 ; v1(1409.45,1629.92) 1562.99,1629.92 ; v1@1464.84,2756.84 1465.77,2755.91 v1(1717.18,2755.91) ; U4.5@1625.98,1596.46 1568.9,1596.46 C11.2@1564.96,1592.52 1564.96,1627.95 1562.99,1629.92 ; R6.2@1866.14,1450.79 1889.76,1474.41 1889.76,1629.92 ; J4.2@1974.8,1629.92 1889.76,1629.92 ; 1562.99,1629.92 1889.76,1629.92
5V: C10.2 C15.1 C16.2 C17.2 D3.K Q2.2 R8.1 R33.2 TP6.1 U4.1 U4.3 U9.2 | length 4820.9
  Top Layer w25: v2(484.25,3318.9) 527.56,3318.9 697.88,3489.22 TP6.1@697.88,3584.92 ; v1(1598.87,3582.14) 1598.87,3472.64 v1(1602.09,3472.64) 1602.09,3421.99 1632.56,3391.52 1724.18,3391.52 1756.2,3359.51 1756.2,2134.15 1684.72,2062.68 1684.72,1736.54 v1(1834.65,1586.61)
  Bottom Layer w12: U4.3@1720.47,1521.65 1690.94,1521.65 1681.1,1531.5 1681.1,1586.61 1690.94,1596.46 U4.1@1720.47,1596.46
  Bottom Layer w25: R33.2@484.25,3179.13 v2(484.25,3318.9) ; TP6.1@697.88,3583.61 v1@1598.87,3583.61 ; v1@1600.27,3471.4 1601.5,3472.64 v1(1602.09,3472.64) ; v1(1685.04,1897.64) 2070.87,1897.64 2129.92,1956.69 C15.1@2149.61,1956.69 ; U4.1@1720.47,1596.46 1824.8,1596.46 v1(1834.65,1586.61) ; Q2.2@1760.87,3218.67 1760.87,3185.04 1763.74,3182.17 1994.23,3182.17 1998.23,3186.17 2010.97,3186.17 R8.1@2049.21,3224.41 ; 2110.24,2106.3 2114.17,2110.24 U9.2@2114.17,2204.72
  other v1: 1755.91,3185.04
AVCC: C7.2 L1.2 U1.61 | length 203.5
  Bottom Layer w12: L1.2@653.99,2160.38 718.95,2160.38 C7.2@722.88,2164.32 763.94,2205.37 763.94,2274.27 U1.61@768.16,2278.49
BACKLIGHT: R13.1 U1.54 | length 901.4
  Bottom Layer w12: U1.54@988.63,2278.49 988.63,2157.56 987.18,2156.11 987.18,2129.86 1024.82,2092.21 1434.25,2092.21 1570.39,2228.35 R13.1@1667.32,2228.35
BAT_MON: R7.1 R12.2 TP3.1 U1.7 | length 344.2
  Bottom Layer w12: TP3.1@417.76,2343.45 466.98,2392.66 R7.1@466.98,2461.56 R12.2@466.98,2520.61 478.79,2532.43 U1.7@608.71,2532.43
CE: LCD1.5 U1.17 | length 929.9
  Top Layer w12: v1(661.39,3361.37) 646.96,3346.94 646.96,2842.14 v1(673.66,2815.43) ; LCD1.5@846.68,3245.73 v1@846.68,3361.37
  Bottom Layer w12: v1(661.39,3361.37) v1(847.29,3361.37) ; v1(673.66,2815.43) U1.17@673.66,2880.84
CLK: LCD1.2 U1.18 | length 626
  Top Layer w12: v1(704.72,3114.17) 704.72,2944.34 v1(705.15,2943.92) ; v1(964.57,3114.17) 964.57,3108.52 965.68,3107.41 LCD1.2@965.68,3245.73
  Bottom Layer w12: U1.18@705.15,2880.87 v1(705.15,2943.92) ; v1@718.77,3114.17 777.85,3114.17 790.7,3101.32 905.08,3101.32 917.93,3114.17 v1@955.11,3114.17
D+: R23.1 U1.33 U10.8 | length 2579.7
  Top Layer w12: v1(1353.94,1824.29) 1349.84,1824.29 1309.69,1864.43 1309.69,1954.77 1365.68,2010.76 1365.68,3087.16 v1(1365.17,3087.67)
  Bottom Layer w12: R23.1@388.24,1989.12 494.9,1882.46 1291.67,1882.46 1349.84,1824.29 v1(1353.94,1824.29) ; U1.33@1211.07,2815.89 1300.97,2815.89 v1(1364.96,2879.88) ; 1365.68,3105.96 1381.81,3122.09 U10.8@1416.78,3122.09
D-: R21.1 U1.32 U10.9 | length 2511.6
  Top Layer w12: v1(1302.66,1824.29) 1291.69,1835.26 1291.69,1962.23 1320.88,1991.42 1320.88,3085.84 v1(1318.08,3088.64)
  Bottom Layer w12: R21.1@388.24,1930.06 415.51,1930.06 481.11,1864.46 1262.49,1864.46 v1(1302.66,1824.29) ; U1.32@1146.11,2880.85 v1@1317.79,2880.85 ; U10.9@1229.77,3122.09 1292.43,3122.09 v1@1318.52,3096
  other v1: 1317.79,2880.42
DC: LCD1.4 U1.16 | length 950.7
  Top Layer w12: v1(608.58,2878.16) 608.58,3222.08 616.1,3229.59 v1(616.1,3357.49) ; LCD1.4@886.68,3245.73 886.68,3357.31 v1(887.26,3357.9)
  Bottom Layer w12: v1(608.58,2878.16) 608.58,2816.02 U1.16@608.71,2815.89 ; v1(616.1,3357.49) 642.88,3330.71 860.07,3330.71 v1(887.26,3357.9)
DIN: LCD1.3 U1.19 | length 691.3
  Top Layer w12: v1(737.06,2815.43) v1@737.06,3083.61 ; v1@925.68,3076.09 v1(925.68,3082.68) LCD1.3@925.68,3245.73
  Bottom Layer w12: U1.19@736.66,2880.85 737.06,2880.45 v1(737.06,2815.43) ; v1(738.14,3083.61) 739.07,3082.68 v1(925.68,3082.68)
FTDI_RTS: U1.36 U10.2 | length 1172.8
  Top Layer w12: v1@1114.09,2666.49 1114.09,2716.45 1228.35,2830.71 1228.35,3224.77 1326.41,3322.83 1439.59,3322.83 v1(1468.81,3352.06)
  Bottom Layer w12: v1(1121.05,2659.53) 1122.47,2660.95 1122.47,2702.38 1141.5,2721.4 U1.36@1211.07,2721.4 ; U10.2@1416.78,3272.09 1461.67,3272.09 1476.38,3286.8 1476.38,3344.49 v1(1468.81,3352.06)
FTDI_TXD: U1.38 U10.1 | length 1131
  Top Layer w12: v1(1059.67,2658.4) 1096.09,2694.83 1096.09,2723.91 1210.35,2838.16 1210.35,3232.22 1330.93,3352.8 v1@1416.98,3352.8
  Bottom Layer w12: v1(1059.67,2658.4) 1097.21,2620.86 1135.98,2620.86 1173.53,2658.41 U1.38@1211.07,2658.41 ; U10.1@1416.78,3297.09 v1@1416.78,3352.8
  other v1: 1416.98,3352.09
GND: C1.1 C2.1 C3.1 C4.1 C5.1 C6.1 C7.1 C8.1 C9.2 C10.1 C11.1 C12.2 C13.1 C15.2 C16.1 C17.1 C18.1 C19.1 J4.6 J5.1 J8.2 J10.5 L6.2 LCD1.7 Q1.S Q3.E Q4.4 R12.1 R26.2 R27.2 R28.2 R34.2 R35.2 R36.2 SP.1 U1.14 U1.24 U1.34 U1.44 U1.52 U1.60 U2.2 U3.2 U4.2 U5.2 U6.2 U7.2 U8.2 U9.4 U10.5 U10.13 | length 1968.9
  Top Layer w25: v1(767.72,3145.67) v1(767.72,3397.64)
  Top Layer w50: 1952.76,3003.94 1955.45,3001.24 J8.2@2034.06,3001.24 ; 2035.43,2917.32 2034.06,2918.69 J8.2@2034.06,3001.24 ; 2137.8,3000 2136.55,3001.24 J8.2@2034.06,3001.24
  Bottom Layer w12: J10.5@183.39,2036.76 v1@246.86,2036.76 ; U1.14@608.71,2752.9 645.61,2752.9 699.48,2699.03 ; 762.25,2008.8 762.25,2089.51 781.94,2109.2 C7.1@781.94,2164.32 781.94,2176.13 799.65,2193.84 U1.60@799.65,2278.49 ; v1(827.24,2955) 878,2955 C3.1@878.72,2954.28 ; C3.1@880.14,2954.28 880.14,2934.35 894.14,2920.34 U1.24@894.14,2880.85 ; U1.52@1051.62,2278.49 1051.62,2224.92 C6.1@1077.21,2199.33 ; v1(1079.68,2139.22) C6.1@1079.68,2195.63 ; v1(1122.05,3224.41) 1124.37,3222.09 U10.13@1229.77,3222.09 ; U1.34@1211.07,2784.39 1342.96,2784.39 C4.1@1364.62,2806.05 1374.46,2796.21 v1@1423.2,2796.21 ; C1.1@1343.56,2435.48 1344.93,2434.11 C5.1@1344.93,2383.86 ; U10.5@1416.78,3197.09 1484.49,3197.09 v1(1492.84,3205.44)
  Bottom Layer w50: 1940.94,3007.87 1947.57,3001.24 J8.2@2034.06,3001.24 ; 2035.43,2937.01 2034.06,2938.38 J8.2@2034.06,3001.24 ; 2114.17,3000 2112.93,3001.24 J8.2@2034.06,3001.24
  other v1: 533.91,168.25 730.76,168.25 927.61,168.25 1124.46,168.25 1321.31,168.25 1518.16,168.25 1715.01,168.25 1911.86,168.25 921.26,322.83 238.63,365.1 1222.88,365.1 1419.73,365.1 1616.58,365.1 1813.43,365.1 2010.28,365.1 681.1,492.13 311.02,496.06 814.96,551.18 1124.46,561.95 1321.31,561.95 1518.16,561.95 1715.01,561.95 1911.86,561.95 2108.71,561.95 811.02,669.29 1222.88,758.8 1813.43,758.8 2010.28,758.8 881.69,785.15 1259.84,952.76 883.68,953.54 1518.16,955.65 1715.01,955.65 1911.86,955.65 2108.71,955.65 1060.43,960.98 1374.02,968.5 1570.62,1116.7 1233.74,1118.54 882.68,1141.73 1813.43,1152.5 2010.28,1152.5 2207.14,1152.5 2295.28,1267.72 2098.43,1299.21 1692.91,1303.15 1909.45,1303.15 1258.98,1315.62 881.69,1316.06 1625.98,1448.82 1795.28,1452.76 2291.34,1476.38 880.7,1493.36 1026.03,1546.21 1344.72,1582.83 1063.88,1666.62 880.7,1669.67 2291.34,1700.79 1854.33,1814.96 2291.34,1822.83 1488.19,1826.77 254.62,1869.4 1490.2,1959.07 968.95,2008.8 1588.52,2027.67 251.76,2031.86 421.26,2082.68 1846.46,2125.98 1921.26,2208.66 1964.57,2208.66 2011.81,2208.66 1228.35,2248.03 1921.26,2251.97 1964.57,2251.97 2011.81,2251.97 1921.26,2295.28 1964.57,2295.28 2011.81,2295.28 921.26,2366.14 188.98,2425.2 1279.53,2460.63 730.76,2530.46 927.61,2530.46 1124.46,2530.46 362.2,2566.93 74.15,2645.03 711.04,2676.24 901.57,2681.1 1420.59,2796.46 1426.31,2874.66 533.91,2924.16 192.91,2937.01 47.24,3027.56 531.5,3051.18 385.83,3055.12 1007.87,3055.12 1933.07,3062.99 866.14,3133.86 2334.65,3326.77 1921.47,3336.41 964.57,3362.2 141.51,3369.29 956.69,3440.94 956.69,3492.13 1222.88,3514.71 1419.73,3514.71 1532.47,3672.92 1115.29,3674.59 604.67,3676.26 2054.77,3679.6
KEY1: J5.6 R1.1 U1.62 | length 2594
  Top Layer w12: v1(737.16,2362.92) 816.68,2283.4 816.68,789.62 v1(881.89,724.41)
  Bottom Layer w12: U1.62@736.66,2278.49 736.66,2362.42 v1(737.16,2362.92) ; v1(881.89,724.41) 1436.43,724.41 R1.1@1470.91,689.92 1670.26,689.92 J5.6@1676.09,684.09
KEY2: J5.5 R2.1 U1.63 | length 3043.3
  Top Layer w12: v1(706.59,2418.97) 705.47,2417.85 705.47,2344.53 787.94,2262.07 787.94,819.44 v1(728.35,759.84)
  Bottom Layer w12: U1.63@705.17,2278.49 705.17,2417.55 v1(706.59,2418.97) ; v1@728.35,755.91 795.28,755.91 910.28,640.9 1441.2,640.9 R2.1@1470.91,611.18 1729.29,611.18 1754.83,636.72 J5.5@1754.83,723.46
KEY3: J5.4 R3.1 U1.64 | length 2457.7
  Top Layer w12: v1(673.23,2220.47) 759.1,2134.6 759.1,845.72 744.09,830.71 v1(740.16,830.71)
  Bottom Layer w12: v1(673.23,2220.47) 673.67,2220.91 U1.64@673.67,2278.49 ; v1(740.16,830.71) 976.38,830.71 1007.87,799.21 1440.36,799.21 R3.1@1470.91,768.66 1670.26,768.66 J5.4@1676.09,762.83